# Altium PCB candy.PcbDoc
Units mil, origin at the board's own origin, x right, y up, seen from the top; angles counter-clockwise.
Board outline 2220 x 1560 mil, 2 copper layers (Top Layer, Bottom Layer); 14 components, 14 nets, 65 pads, 0 vias.
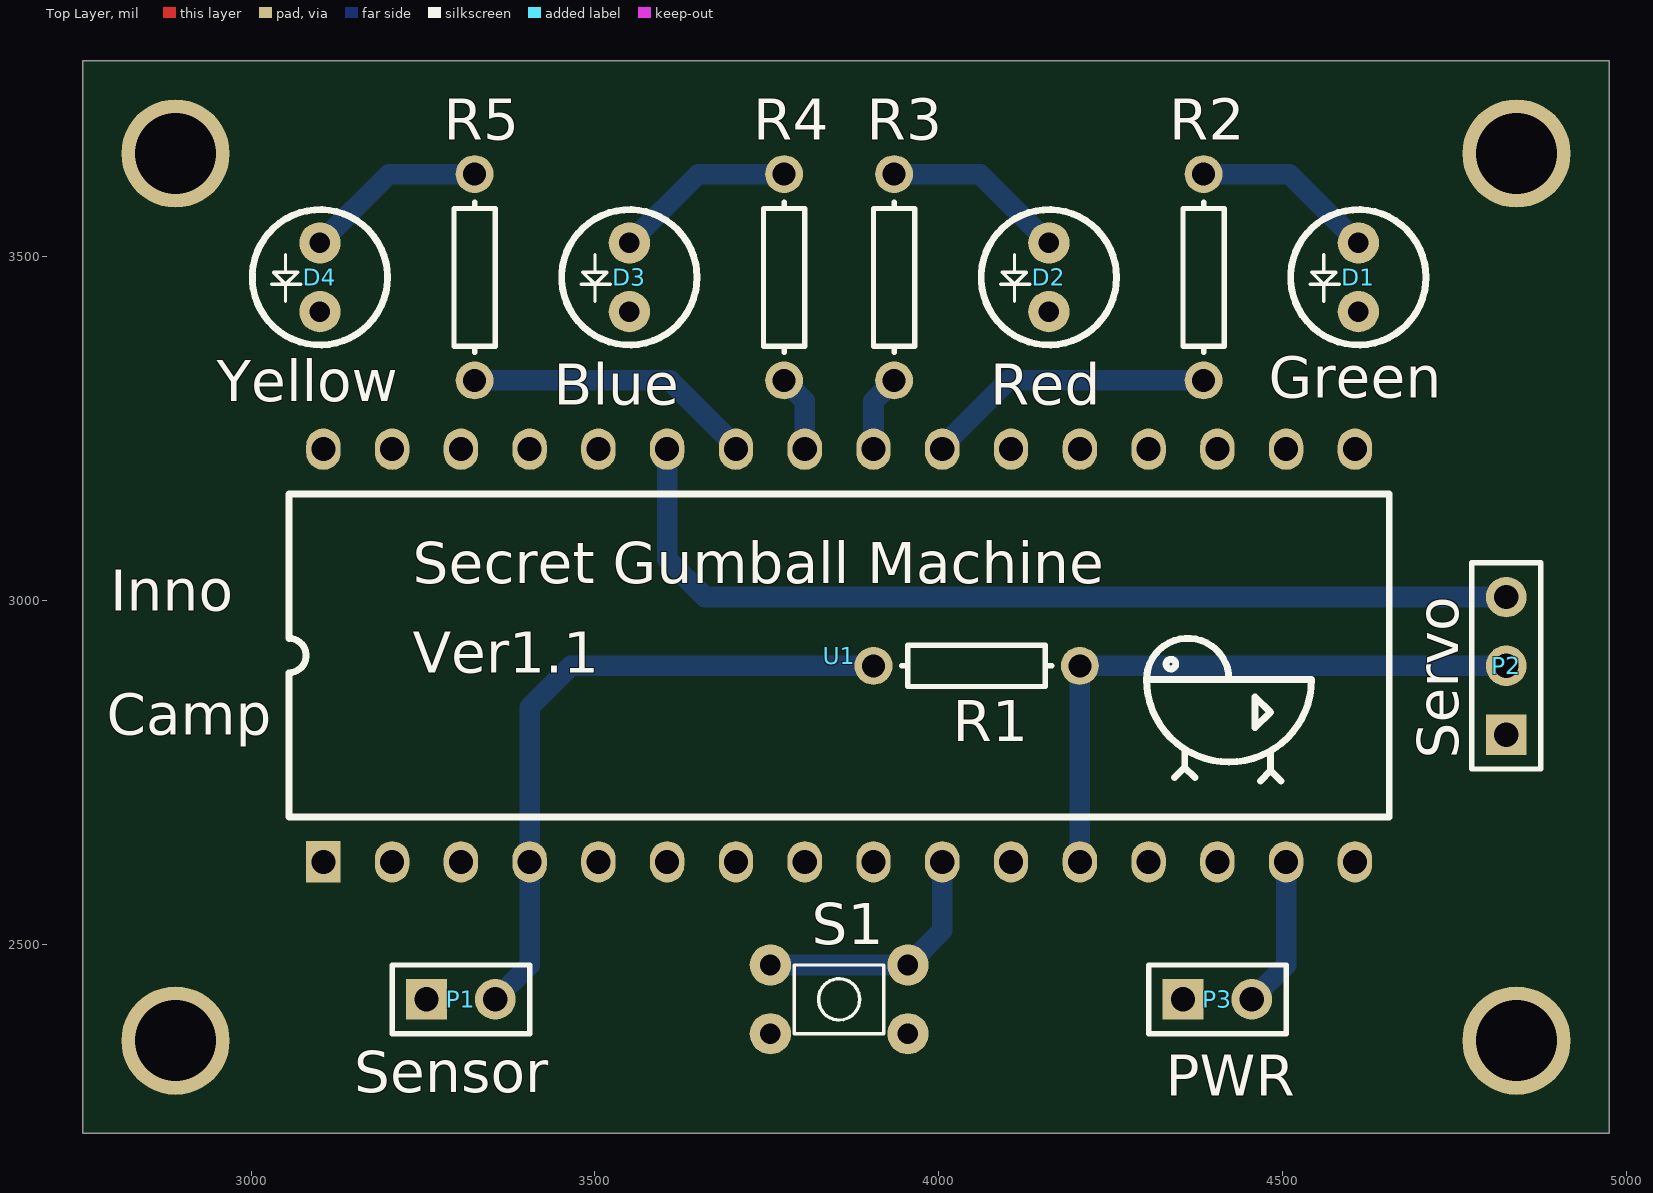
[diagram p0: Top Layer view]
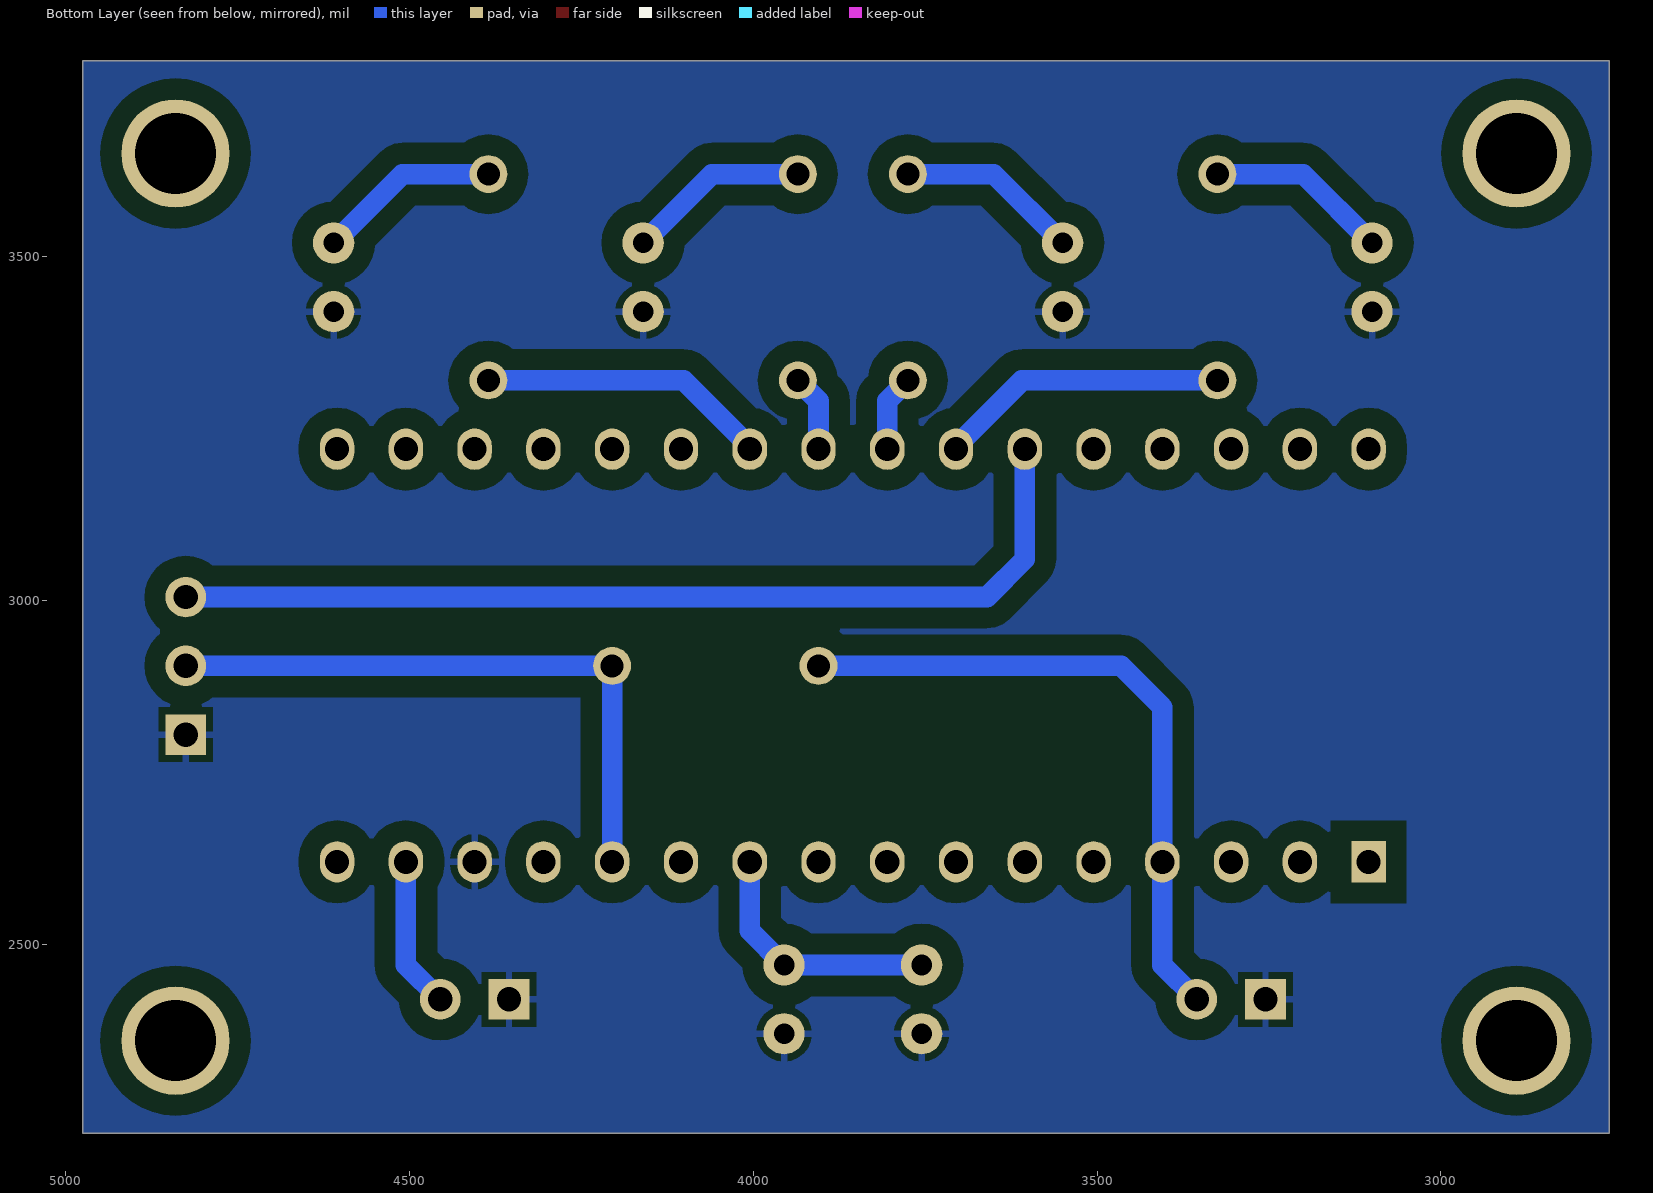
[diagram p1: Bottom Layer view, seen from below]

## Layer stack, top to bottom
Top Solder: solder mask 0.4, Solder Resist, Dk 3.5
Top Layer: signal copper 1.4
Dielectric 1: dielectric 12.6, FR-4, Dk 4.8
Bottom Layer: signal copper 1.4
Bottom Solder: solder mask 0.4, Solder Resist, Dk 3.5

## Board outline
2755,3785 2755,2225 4975,2225 4975,3785

## Design rules (kind name [scope] priority, off if disabled: settings)
Clearance [All] p1: gap=30
ComponentClearance [All] p1 off: gap=10 collisioncheckmode=3 verticalgap=10 showdistances=FALSE
PolygonConnect [All] p1: connectstyle=Relief reliefconductorwidth=10 reliefentries=4 polygonreliefangle="90 Angle" airgapwidth=10
RoutingVias [All] p1: holewidth=28 width=50 viastyle="Through Hole" minholewidth=28 minwidth=50 maxholewidth=28 maxwidth=50
SolderMaskExpansion [All] p1: expansion=4
Width [All] p1: maxlimit=100 minlimit=10 preferedwidth=30
29 further rules are at their usual default settings.

## Components (designator, comment, footprint, x,y, rotation, side; value= is the part's Value field where it differs from the comment)
D1 "Green" LED_3mm 4610,3520 r270 top
D2 "Red" LED_3mm 4160,3520 r270 top
D3 "Blue" LED_3mm 3550,3520 r270 top
D4 "Yellow" LED_3mm 3100,3520 r270 top
P1 "Sensor" HDR1X2 3255,2420 r0 top
P2 "Servo" HDR1X3 4825,2805 r90 top
P3 "PWR" HDR1X2 4355,2420 r0 top
R1 "Res2" AXIAL-0.3 4055,2905 r0 top
R2 "Res2" AXIAL-0.3 4385,3470 r270 top
R3 "Res2" AXIAL-0.3 3935,3470 r270 top
R4 "Res2" AXIAL-0.3 3775,3470 r270 top
R5 "Res2" AXIAL-0.3 3325,3470 r270 top
S1 "SW-PB" SW 3755,2370 r0 top
U1 "Arduino" Arduino_nano 3105,2620 r90 top locked

## Footprints (in the part's own frame and the unit in brackets; to place one, negate y for a bottom-side part, rotate by r counter-clockwise, add the part's x,y. Pads: shape width x height; smd on the part's side, far side on the other; paste and mask are expansions set on the pad)
Arduino_nano [mil]
  rect 60x50 / inner rect 100x50 / far side rect 60x50 hole 35: 1(0,0)
  oval 60x50 / inner oval 100x50 / far side oval 60x50 hole 35: 2(0,-100) 3(0,-200) 4(0,-300) 5(0,-400) 6(0,-500) 7(0,-600) 8(0,-700) 9(0,-800) 10(0,-900) 11(0,-1000) 12(0,-1100) 13(0,-1200) 14(0,-1300) 15(0,-1400) 16(0,-1500) 17(600,-1500) 18(600,-1400) 19(600,-1300) 20(600,-1200) 21(600,-1100) 22(600,-1000) 23(600,-900) 24(600,-800) 25(600,-700) 26(600,-600) 27(600,-500) 28(600,-400) 29(600,-300) 30(600,-200) 31(600,-100) 32(600,0)
  silkscreen extent 65,-1550 535,50
AXIAL-0.3 [mm] "Axial Device, Thru-Hole; 2 Leads; 0.3 in Pin Spacing"
  round 1.4 hole 0.85: 1(-3.81,0) 2(3.81,0)
  silkscreen extent -2.77,-0.76 2.77,0.76
HDR1X2 [mm] "Connector; Header; 2 Position"
  rect 1.5x1.5 hole 0.9: 1(0,0)
  round 1.5 hole 0.9: 2(2.54,0)
  silkscreen extent -1.27,-1.27 3.81,1.27
HDR1X3 [mm] "Connector; Header; 3 Position"
  rect 1.5x1.5 hole 0.9: 1(0,0)
  round 1.5 hole 0.9: 2(2.54,0) 3(5.08,0)
  silkscreen extent -1.27,-1.27 6.35,1.27
LED_3mm [mil]
  round 60 hole 30: 1(0,0) 2(100,0)
  silkscreen extent -48,-98 148,98
SW [mil]
  round 60 hole 30: 1(0,0) 1(200,0) 2(0,100) 2(200,100)
  silkscreen extent 35,0 165,100

## Part data
D1 D2 D3 D4: library part LED0, "Typical INFRARED GaAs LED"
P1 P3: library part "Header 2", "Header, 2-Pin"
P2: library part "Header 3", "Header, 3-Pin"
R1 R2 R3 R4 R5: "Resistor"
S1: "Switch"
U1: library part Arduino_nano

## Free pads (board coordinates)
  round 157.48 hole 118.11: 3(2890,2360) 3(2890,3650) 3(4840,2360) 3(4840,3650)

## Nets (pads, with @x,y where several pads share a name; then routed paths per layer and width w, separated by ;. In a path a pad name is that pad's centre, name@x,y a point inside that pad or via, vN(x,y) a via of type N, cw(c..) or ccw(c..) an arc to the next point about the centre after c; other vN are vias at no path point)
GND: D1.2 D2.2 D3.2 D4.2 P1.1 P2.1 P3.1 S1.1 U1.14
NetD1_1: D1.1 R2.1 | length 266.4
  Bottom Layer w30: R2.1 4510,3620 D1.1
NetD2_1: D2.1 R3.1 | length 266.4
  Bottom Layer w30: R3.1 4060,3620 D2.1
NetD3_1: D3.1 R4.1 | length 266.4
  Bottom Layer w30: D3.1 3650,3620 R4.1
NetD4_1: D4.1 R5.1 | length 266.4
  Bottom Layer w30: D4.1 3200,3620 R5.1
NetP1_2: P1.2 R1.1 U1.4 | length 970.6
  Bottom Layer w30: P1.2 3405,2470 U1.4 3405,2845 3465,2905 R1.1
NetP2_3: P2.3 U1.27 | length 1406.8
  Bottom Layer w30: U1.27@3605,3223.99 U1.27 3605,3060 3660,3005 P2.3
NetR2_2: R2.2 U1.23 | length 423.8
  Bottom Layer w30: U1.23 4005,3223.99 4101.01,3320 R2.2
NetR3_2: R3.2 U1.24 | length 112.4
  Bottom Layer w30: U1.24 3905,3290 R3.2
NetR4_2: R4.2 U1.25 | length 112.4
  Bottom Layer w30: R4.2 3805,3290 U1.25
NetR5_2: R5.2 U1.26 | length 423.8
  Bottom Layer w30: R5.2 3608.99,3320 3705,3223.99 U1.26
NetS1_2: S1.2 U1.10 | length 370.7
  Bottom Layer w30: S1.2@3755,2470 3955,2470 4005,2520 U1.10
VCC: P2.2 R1.2 U1.12 | length 905
  Bottom Layer w30: U1.12 R1.2 P2.2
VIN: P3.2 U1.15 | length 220.7
  Bottom Layer w30: P3.2 4505,2470 U1.15
pads on no net: U1.1 U1.2 U1.3 U1.5 U1.6 U1.7 U1.8 U1.9 U1.11 U1.13 U1.16 U1.17 U1.18 U1.19 U1.20 U1.21 U1.22 U1.28 U1.29 U1.30 U1.31 U1.32

## Polygon pours and split planes (outlines as drawn)
GND on Bottom Layer "Bottom Layer-No Net" (solid, remove dead copper, pour order 2): 2755,3785 2755,2225 4975,2225 4975,3785

## Silkscreen, mask and mechanical layers (free items; w line width, h text height)
Top Overlay:
  circle w10: c4337.5,2907.5 r7.07
  lines w10: 4342.5,2742.5 4357.5,2757.5 ; 4357.5,2782.5 4357.5,2757.5 ; 4372.5,2742.5 4357.5,2757.5 ; 4422.01,2885.08 ccw(c4362.01,2885.08) 4302.01,2885.08 ; 4467.5,2737.5 4482.5,2752.5 ; 4482.5,2777.5 4482.5,2752.5 ; 4497.5,2737.5 4482.5,2752.5 ; 4302.01,2885.08 ccw(c4422.01,2885.08) 4542.01,2885.08 4302.01,2885.08 ; 4460,2815 4460,2860 4482.5,2837.5 4460,2815
  text "Secret Gumball Machine" at 3235,3025 h60
  text "Inno" at 2795,2985 h60
  text "Ver1.1" at 3235,2895 h60
  text "Camp" at 2790,2805 h60
Mechanical 1:
  the board outline again, w10